# Altium PCB fpga.PcbDoc
Units mil, origin at the board's own origin, x right, y up, seen from the top; angles counter-clockwise.
Board outline 2800 x 2800 mil, 2 copper layers (Top Layer, Bottom Layer); 16 components, 104 nets, 284 pads, 58 vias.
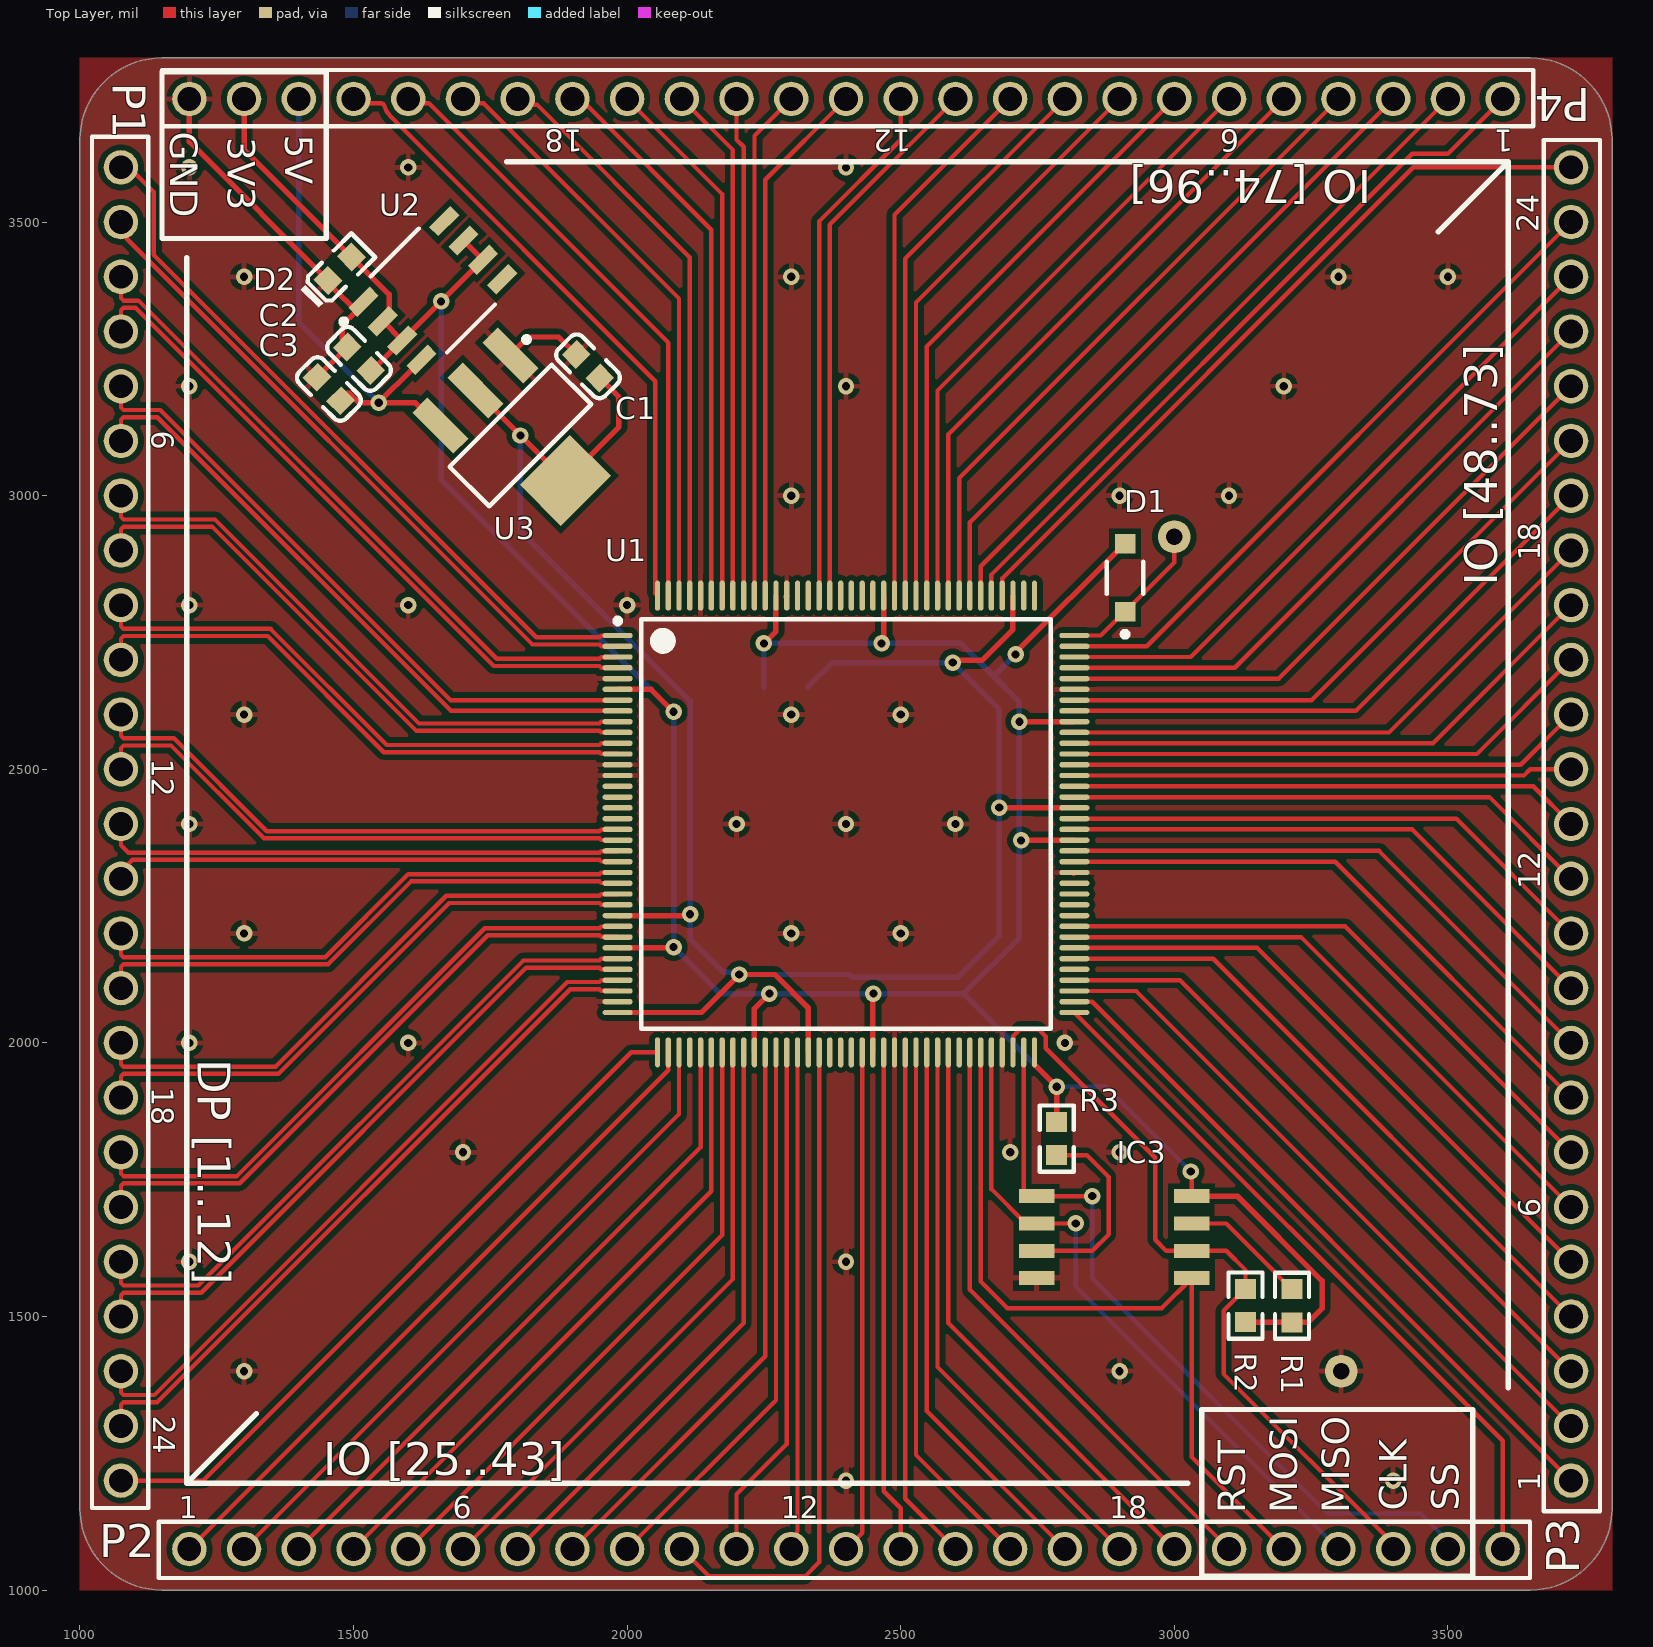
[diagram p0: Top Layer view]
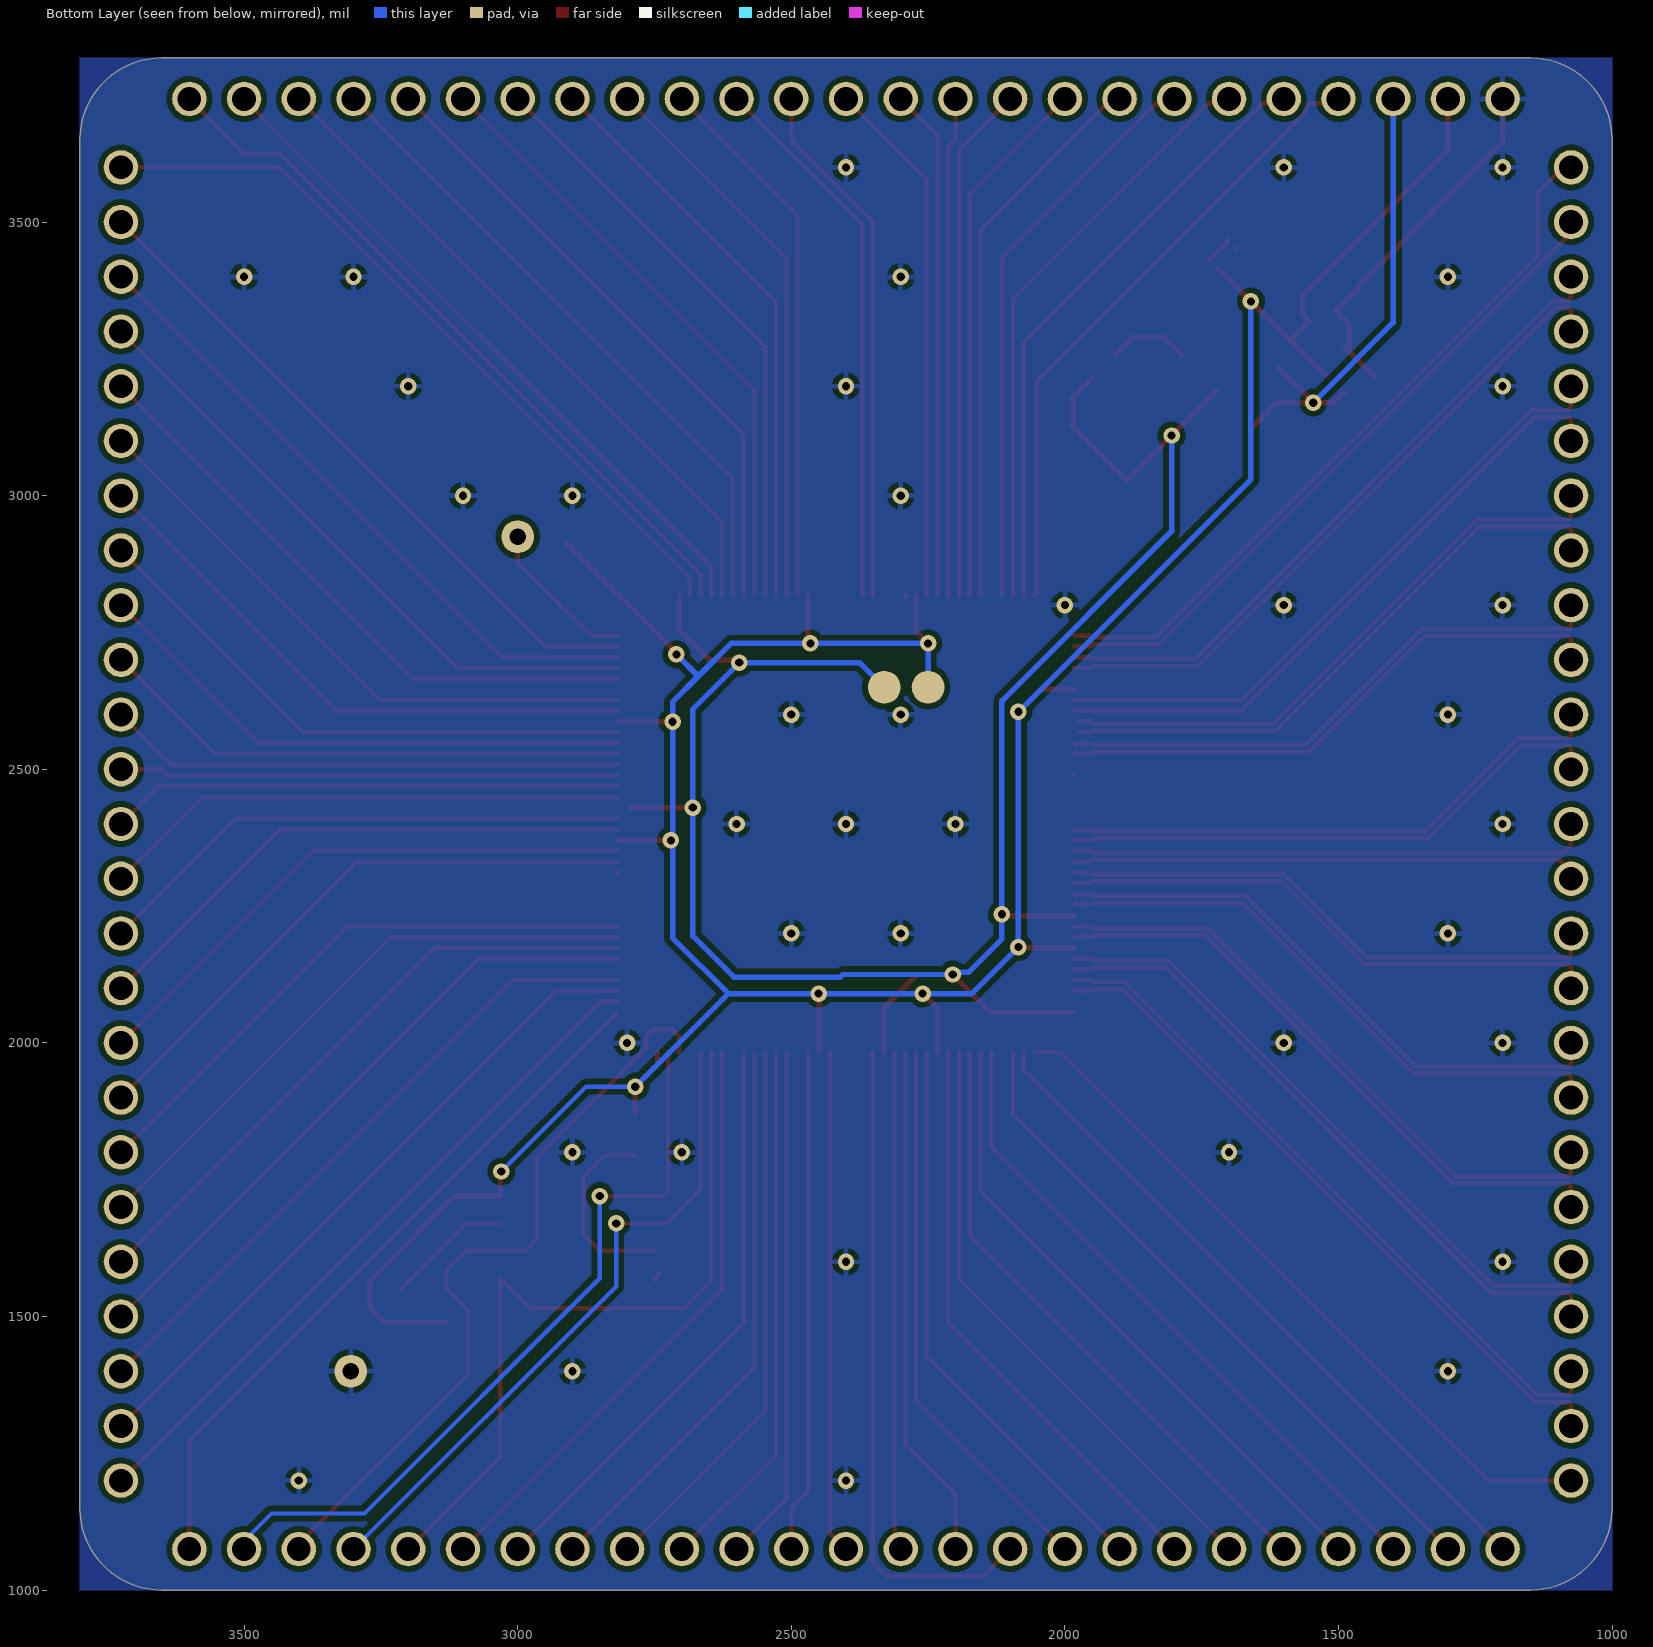
[diagram p1: Bottom Layer view, seen from below]
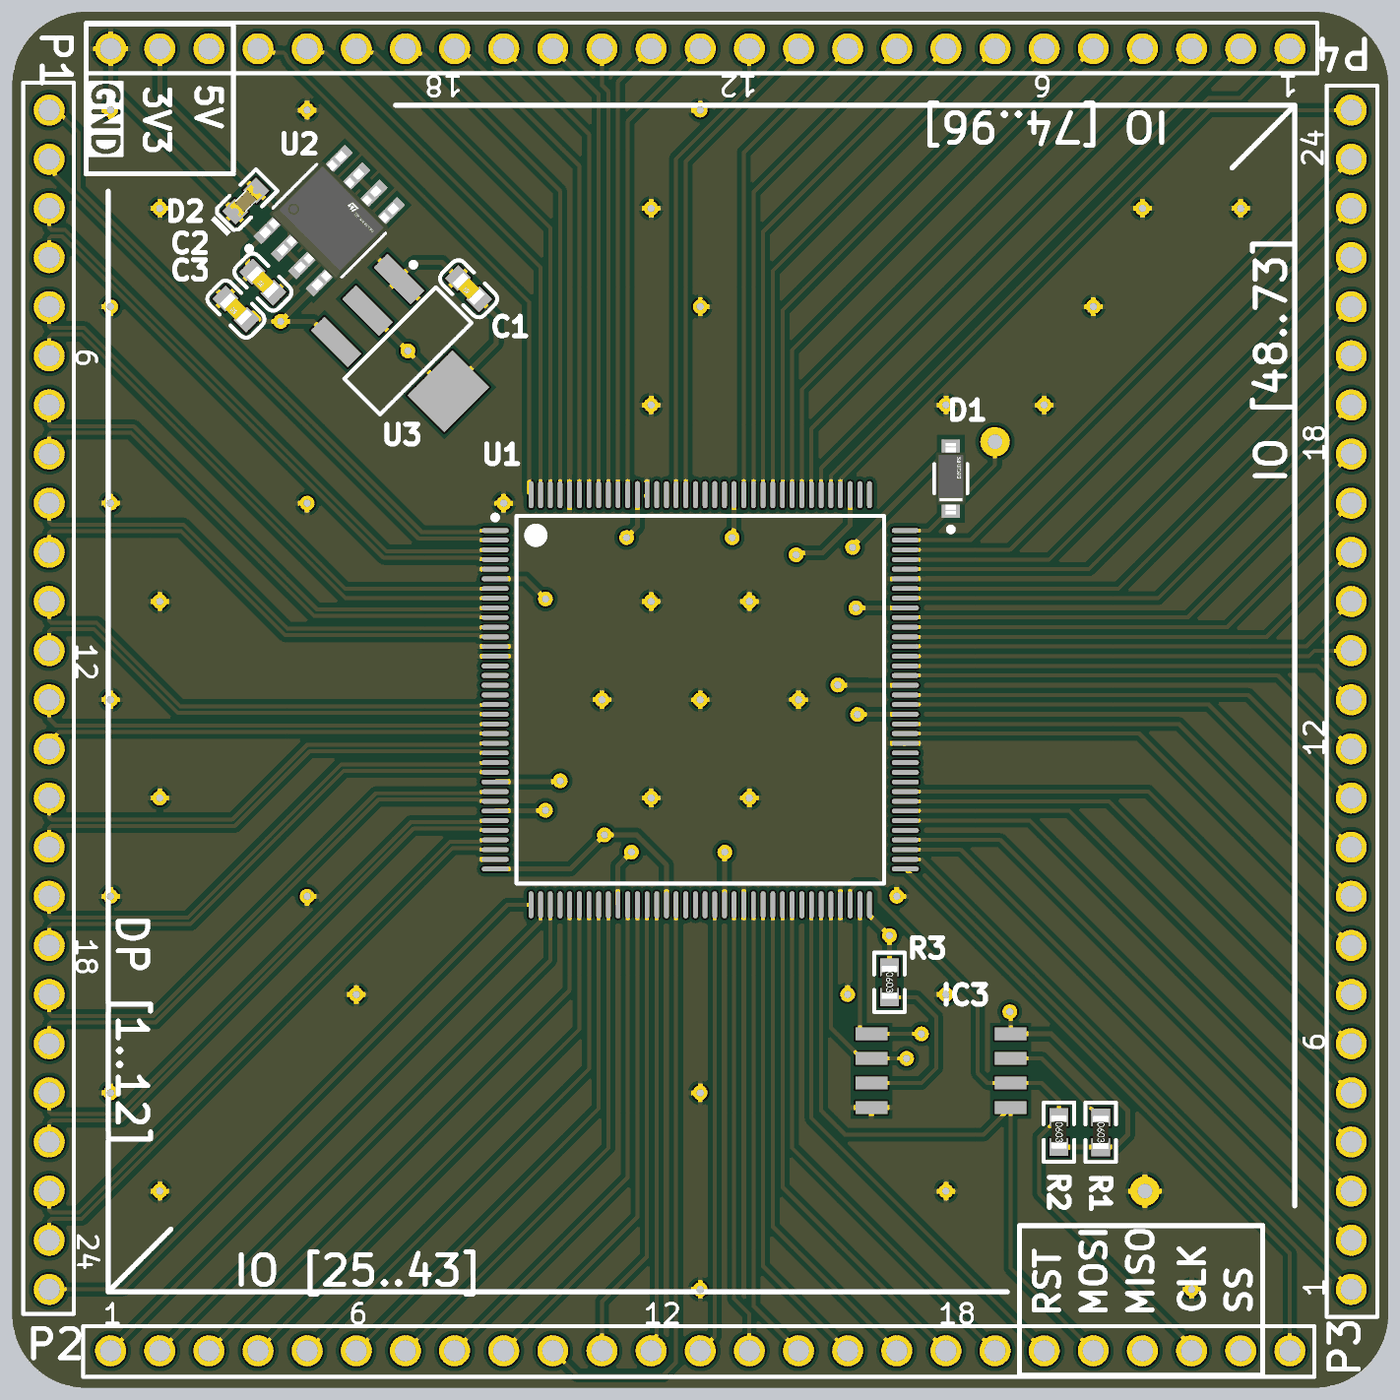
[diagram p2: 3D render of the assembled board from above, using the file's embedded part models]

## Layer stack, top to bottom
Top Solder: solder mask 0.4, Solder Resist, Dk 3.5
Top Layer: signal copper 1.4
Dielectric 1: dielectric 12.6, FR-4, Dk 4.8
Bottom Layer: signal copper 1.4
Bottom Solder: solder mask 0.4, Solder Resist, Dk 3.5

## Board outline
1000,1150 1000,3650 cw(c1150,3650) 1150,3800 3650,3800 cw(c3650,3650) 3800,3650 3800,1150 cw(c3650,1150) 3650,1000 1150,1000 cw(c1150,1150)

## Design rules (kind name [scope] priority, off if disabled: settings)
Clearance Clearance_5 [InPolygon] p1: gap=10 ignorepadtopadclearanceinfootprint=FALSE
Clearance [All] p2: gap=5 ignorepadtopadclearanceinfootprint=FALSE
DiffPairsRouting [All] p1: maxlimit=10 minlimit=5 mostfreqgap=5 toplayer_minwidth=5 toplayer_maxwidth=8 toplayer_prefwidth=8 bottomlayer_minwidth=5 bottomlayer_maxwidth=8 bottomlayer_prefwidth=8 maxuncoupledlength=500
MinimumSolderMaskSliver [All] p1: minsoldermaskwidth=7.87
MinimumSolderMaskSliver MinimumSolderMaskSliver_1 [All] p2: minsoldermaskwidth=0
PolygonConnect [All] p1: connectstyle=Relief reliefconductorwidth=10 reliefentries=4 polygonreliefangle="90 Angle" airgapwidth=10
RoutingVias [All] p1: holewidth=15 width=30 viastyle="Through Hole" minholewidth=15 minwidth=30 maxholewidth=15 maxwidth=30
SilkToSilkClearance [All] p1: silktosilkclearance=0
SilkToSolderMaskClearance [IsPad] p1: minsilkscreentomaskgap=6 clearancetoexposedcopper=TRUE
SilkToSolderMaskClearance SilkToSolderMaskClearance_1 [IsPad] p2: minsilkscreentomaskgap=7 clearancetoexposedcopper=TRUE
SolderMaskExpansion [All] p1: expansion=4 istentingtop=FALSE
SolderMaskExpansion SolderMaskExpansion_1 [All] p2: expansion=2 istentingtop=FALSE
Width [All] p1: maxlimit=16 minlimit=8 preferedwidth=8
26 further rules are at their usual default settings.

## Classes and differential pairs
component class fpga: C1 C2 D1 IC3 P1 P2 P3 R2 R3 U1 U2
differential pair P11: +P11_P -P11_N
differential pair P10: +P10_P -P10_N
differential pair P9: +P9_P -P9_N
differential pair P8: +P8_P -P8_N
differential pair P7: +P7_P -P7_N
differential pair P6: +P6_P -P6_N
differential pair P5: +P5_P -P5_N
differential pair P4: +P4_P -P4_N
differential pair P3: +P3_P -P3_N
differential pair P2: +P2_P -P2_N
differential pair P1: +P1_P -P1_N
differential pair P0: +P0_P -P0_N

## Components (designator, comment, footprint, x,y, rotation, side; value= is the part's Value field where it differs from the comment)
C1 "1uF (105) 10% 50V" 0603_C 1928.56,3236.44 r135 top
C2 "1uF (105) 10% 50V" 0603_C 1510,3250 r135 top
C3 "10uF (106) 10% 10V" 0603_C 1455,3195 r135 top
D1 "1N4148W-13-F" FP-SOD123-MFG 2910,2850 r90 top value=2pF
D2 "绿灯 0603" 0603_LED_S1 1475,3415 r45 top
IC3 "W25Q16JVSSIQ" SOIC127P790X216-8N 2890,1645 r0 top
P1 "61301011121" 61301011121 1000,3675 r270 top
P2 "61301011121" 61301011121 1125,1000 r0 top
P3 "61301011121" 61301011121 3800,1125 r90 top
P4 "61301011121" 61301011121 3675,3800 r180 top
R1 "10KΩ (1002) ±1%" 0603_R 3215,1519.69 r270 top
R2 "10KΩ (1002) ±1%" 0603_R 3130,1520 r270 top
R3 "10KΩ (1002) ±1%" 0603_R 2785,1825 r270 top
U1 "ICE40HX1K-TQ144" LATC-TQFP-144_L 2400,2400 r0 top
U2 "LD1117D33TR" FP-SO-8-0016023-MFG 1645,3375 r45 top
U3 "LD1117S12TR" SOT-223_M 1805,3110 r315 top

## Footprints (in the part's own frame and the unit in brackets; to place one, negate y for a bottom-side part, rotate by r counter-clockwise, add the part's x,y. Pads: shape width x height; smd on the part's side, far side on the other; paste and mask are expansions set on the pad)
0603_C [mm]
  rect 0.93x0.98 smd: 1(-0.77,0) 2(0.77,0)
  silkscreen extent -1.54,-0.79 1.54,0.79, body extent -0.8,-0.4 0.8,0.4, height 0.3
0603_LED_S1 [mm]
  rect 0.93x0.98 smd: A(0.77,0) K(-0.77,0)
  silkscreen extent -1.98,-0.79 1.54,0.79, body extent -0.8,-0.4 0.8,0.4, height 0.6
0603_R [mm]
  rect 0.93x0.98 smd: 1(-0.77,0) 2(0.77,0)
  silkscreen extent -1.53,-0.79 1.54,0.79, body extent -0.85,-0.4 0.85,0.4, height 0.56
61301011121 [mm] "Pin Header, pitch 2.54 mm, THT, Vertical, single row, 10p"
  round 1.6 hole 1.1: 1(1.905,1.905) 2(4.445,1.905) 3(6.985,1.905) 4(9.525,1.905) 5(12.065,1.905) 6(14.605,1.905) 7(17.145,1.905) 8(19.685,1.905) 9(22.225,1.905) 10(24.765,1.905) 11(27.305,1.905) 12(29.845,1.905) 13(32.385,1.905) 14(34.925,1.905) 15(37.465,1.905) 16(40.005,1.905) 17(42.545,1.905) 18(45.085,1.905) 19(47.625,1.905) 20(50.165,1.905) 21(52.705,1.905) 22(55.245,1.905) 23(57.785,1.905) 24(60.325,1.905) 25(62.865,1.905)
  silkscreen extent 0.49,0.56 64.13,3.18
FP-SO-8-0016023-MFG [mm]
  rect 1.4x0.6 smd paste+0 mask+0: 1(-2.65,1.905) 2(-2.65,0.635) 3(-2.65,-0.635) 4(-2.65,-1.905) 5(2.65,-1.905) 6(2.65,-0.635) 7(2.65,0.635) 8(2.65,1.905)
  silkscreen extent -4.07,-2.5 1.58,2.5, body extent -3.45,-2.6 3.45,2.6, height 0.25
FP-SOD123-MFG [mm]
  rect 0.9x0.95 smd paste+0 mask+0: 1(-1.575,0) 2(1.575,0)
  silkscreen extent -2.75,-0.85 0.75,0.85, body extent -2.12,-0.95 2.12,0.95, height 0.25
LATC-TQFP-144_L [mm] "QFP, 144-Leads, Body 20x20mm, Pitch 0.5mm, IPC High Density"
  oval 1.4x0.25 smd: 1(-10.6,8.75) 2(-10.6,8.25) 3(-10.6,7.75) 4(-10.6,7.25) 5(-10.6,6.75) 6(-10.6,6.25) 7(-10.6,5.75) 8(-10.6,5.25) 9(-10.6,4.75) 10(-10.6,4.25) 11(-10.6,3.75) 12(-10.6,3.25) 13(-10.6,2.75) 14(-10.6,2.25) 15(-10.6,1.75) 16(-10.6,1.25) 17(-10.6,0.75) 18(-10.6,0.25) 19(-10.6,-0.25) 20(-10.6,-0.75) 21(-10.6,-1.25) 22(-10.6,-1.75) 23(-10.6,-2.25) 24(-10.6,-2.75) 25(-10.6,-3.25) 26(-10.6,-3.75) 27(-10.6,-4.25) 28(-10.6,-4.75) 29(-10.6,-5.25) 30(-10.6,-5.75) 31(-10.6,-6.25) 32(-10.6,-6.75) 33(-10.6,-7.25) 34(-10.6,-7.75) 35(-10.6,-8.25) 36(-10.6,-8.75) 73(10.6,-8.75) 74(10.6,-8.25) 75(10.6,-7.75) 76(10.6,-7.25) 77(10.6,-6.75) 78(10.6,-6.25) 79(10.6,-5.75) 80(10.6,-5.25) 81(10.6,-4.75) 82(10.6,-4.25) 83(10.6,-3.75) 84(10.6,-3.25) 85(10.6,-2.75) 86(10.6,-2.25) 87(10.6,-1.75) 88(10.6,-1.25) 89(10.6,-0.75) 90(10.6,-0.25) 91(10.6,0.25) 92(10.6,0.75) 93(10.6,1.25) 94(10.6,1.75) 95(10.6,2.25) 96(10.6,2.75) 97(10.6,3.25) 98(10.6,3.75) 99(10.6,4.25) 100(10.6,4.75) 101(10.6,5.25) 102(10.6,5.75) 103(10.6,6.25) 104(10.6,6.75) 105(10.6,7.25) 106(10.6,7.75) 107(10.6,8.25) 108(10.6,8.75)
  oval 0.25x1.4 smd: 37(-8.75,-10.6) 38(-8.25,-10.6) 39(-7.75,-10.6) 40(-7.25,-10.6) 41(-6.75,-10.6) 42(-6.25,-10.6) 43(-5.75,-10.6) 44(-5.25,-10.6) 45(-4.75,-10.6) 46(-4.25,-10.6) 47(-3.75,-10.6) 48(-3.25,-10.6) 49(-2.75,-10.6) 50(-2.25,-10.6) 51(-1.75,-10.6) 52(-1.25,-10.6) 53(-0.75,-10.6) 54(-0.25,-10.6) 55(0.25,-10.6) 56(0.75,-10.6) 57(1.25,-10.6) 58(1.75,-10.6) 59(2.25,-10.6) 60(2.75,-10.6) 61(3.25,-10.6) 62(3.75,-10.6) 63(4.25,-10.6) 64(4.75,-10.6) 65(5.25,-10.6) 66(5.75,-10.6) 67(6.25,-10.6) 68(6.75,-10.6) 69(7.25,-10.6) 70(7.75,-10.6) 71(8.25,-10.6) 72(8.75,-10.6) 109(8.75,10.6) 110(8.25,10.6) 111(7.75,10.6) 112(7.25,10.6) 113(6.75,10.6) 114(6.25,10.6) 115(5.75,10.6) 116(5.25,10.6) 117(4.75,10.6) 118(4.25,10.6) 119(3.75,10.6) 120(3.25,10.6) 121(2.75,10.6) 122(2.25,10.6) 123(1.75,10.6) 124(1.25,10.6) 125(0.75,10.6) 126(0.25,10.6) 127(-0.25,10.6) 128(-0.75,10.6) 129(-1.25,10.6) 130(-1.75,10.6) 131(-2.25,10.6) 132(-2.75,10.6) 133(-3.25,10.6) 134(-3.75,10.6) 135(-4.25,10.6) 136(-4.75,10.6) 137(-5.25,10.6) 138(-5.75,10.6) 139(-6.25,10.6) 140(-6.75,10.6) 141(-7.25,10.6) 142(-7.75,10.6) 143(-8.25,10.6) 144(-8.75,10.6)
  silkscreen extent -10.72,-9.5 9.5,9.55, body extent -10,-10 10,10, height 1.6
SOIC127P790X216-8N [mm]
  rect 1.65x0.65 smd: 1(-3.6,1.905) 2(-3.6,0.635) 3(-3.6,-0.635) 4(-3.6,-1.905) 5(3.6,-1.905) 6(3.6,-0.635) 7(3.6,0.635) 8(3.6,1.905)
SOT-223_M [mm] "SOT223, 4-Leads, Body 6.5x3.5mm, Pitch 2.3mm, Lead Span 7mm, IPC Low Density"
  rect 2.7x1 smd: 1(-2.95,2.3) 2(-2.95,0) 3(-2.95,-2.3)
  rect 2.7x3.3 smd: 4(2.95,0)
  silkscreen extent -3.07,-3.35 1.3,3.47, body extent -1.85,-3.35 1.85,3.35, height 1.8

## Part data
C1 C2: library part "0603 1uF (105) 10% 50V", "贴片电容", Package=0603, SuppliersPartNumber=C15849, ComponentLink1Description=供应商链接, ComponentLink1URL=http://www.szlcsc.com/product/details_16531.html, Supplier=LC
C3: library part "0603 10uF (106) 10% 10V", "贴片电容", Package=0603, SuppliersPartNumber=C19702, ComponentLink1Description=供应商链接, ComponentLink1URL=http://www.szlcsc.com/product/details_20411.html, Supplier=LC
D1: library part CMP-12791-000005-1, "DIODE GEN PURP 100V 150MA SOD123", Capacitance=2pF, Forward Current=300mA, Manufacturer="Diodes Inc.", Max Junction Temp=+150°C, Max Repetitive Reverse Voltage=100V, Max Surge Forward Current=1A, Package=SOD123, Peak Reverse Current=1uA, Temperature="-65°C to +150°C", Temperature Range Low=-65°C, Automotive=No, Category=Diode, ComponentLink2Description=Datasheet, ComponentLink2URL=https://upverter.com/datasheet/628e7d6fee5901eee6eef4567d1c3569f2cd3cde.pdf, Device Class L1="Discrete Semiconductors", Device Class L2=Diodes, Device Class L3="Rectifier Diodes", Digikey Description="DIODE GEN PURP 100V 150MA SOD123", Footprint Url=https://www.diodes.com/assets/Package-Files/SOD123.pdf, Height=1.45mm, Lead Free=Yes, Manufacturer Part Number=1N4148W-13-F, Mouser Description="1N4148W Series 2 A 100 V 400 mW Surface Mount Fast Switching Diode - SOD-123", Octopart=https://octopart.com/1n4148w-13-f-diodes+inc.-2359612, Reverse Voltage=100V, RoHS=TRUE, Standoff Height=0mm, Temperature Range High=+150°C
D2: library part "0603 绿灯", "发光二极管", Package=0603, SuppliersPartNumber=C72043, ComponentLink1Description=供应商链接, ComponentLink1URL=http://www.szlcsc.com/product/details_73152.html, Supplier=LC
IC3: Manufacturer_Name=Winbond, Package=SOIC127P790X216-8N, Arrow_Part_Number=W25Q16JVSSIQ, Arrow_Price-Stock=https://www.arrow.com/en/products/w25q16jvssiq/winbond-electronics, DeviceSetName=W25Q16JVSSIQ, GateName_1=G$1, Height=2.16mm, LibraryName=W25Q16JVSSIQ, Manufacturer_Part_Number=W25Q16JVSSIQ, Mouser_Part_Number=454-W25Q16JVSSIQ, Mouser_Price-Stock=https://www.mouser.co.uk/ProductDetail/Winbond/W25Q16JVSSIQ?qs=qSfuJ%252Bfl%2Fd46L%2F1QrQC%2Fog%3D%3D, SymbolName_1=W25Q16JVSSIQ
P1 P2 P3 P4: library part header, "THT Vertical Pin Header WR-PHD, Pitch 2.54 mm, Single Row, 25 pins"
R1 R2 R3: library part "0603 10KΩ (1002) 1%", "贴片电阻", Package=0603, SuppliersPartNumber=C25804, ComponentLink1Description=供应商链接, ComponentLink1URL=http://www.szlcsc.com/product/details_26547.html, Supplier=LC
U1: library part CMP-0962-00009-1, "iCE40 HX1K Series FPGA Family, 1280 Logic Cells, 1.2 V Core, 64 K Embedded RAM Bits, 144-pin TQFP, Pb-Free, Tray", Manufacturer="Lattice Semiconductor", Supply Voltage=1.2V, ComponentLink1Description="Manufacturer URL", ComponentLink1URL=http://www.latticesemi.com/en, ComponentLink2Description=Datasheet, ComponentLink2URL=http://www.latticesemi.com/~/media/Documents/DataSheets/iCE/iCE40LPHXFamilyDataSheet.pdf, ComponentLink3Description="Package Specification", ComponentLink3URL=http://www.latticesemi.com/lit/docs/package/pkg.pdf, DatasheetVersion="Rev. 02.9", Embedded RAM Bits=64K, Logic Cells=1280, Mounting Technology="Surface Mount", PackageDescription="144-Pin Thin Quad Flat Package, Body 20 x 20 mm, Pitch 0.5 mm", PackageReference=TQFP-144, PackageVersion="Rev. 03.9, 02/2013", Packing=Tray, PartNumber=ICE40HX1K-TQ144, Phase-Locked Loops=1, RoHS=TRUE
U2: library part CMP-0244-00261-2, "IC REG LINEAR 3.3V 800MA 8SO", Case/Package=SO, Dropout Voltage=1.1V, Input Bias Current=5mA, Max Input Voltage=15V, Max Operating Temperature=150°C, Max Output Current=1.3A, Max Power Dissipation=12W, Min Operating Temperature=0°C, Min Output Voltage=3.3V, Output Current=800mA, Output Voltage Accuracy=1%, Package Quantity=1, Quiescent Current=10mA, Accuracy=1%, Height=1.65mm, Lead Free="Lead Free", Length=5mm, Mount="Surface Mount", Number of Outputs=1, Number of Pins=8, Number of Regulators=1, Output Type=Fixed, Output Voltage=3.3V, Packaging="Tape and Reel", Polarity=Positive, Power Dissipation=12W, Radiation Hardening=No, Width=4mm
U3: library part CMP-0244-00318-1, "Fixed Low Drop Positive Voltage Regulator, 1.2V, 4-Pin SOT-223, Tape and Reel", ComponentLink1Description="Manufacturer URL", ComponentLink1URL=http://www.st.com, ComponentLink2Description=Datasheet, ComponentLink2URL=http://www.st.com/internet/com/TECHNICAL_RESOURCES/TECHNICAL_LITERATURE/DATASHEET/CD00000544.pdf, DatasheetVersion=1/11/2011, PackageDescription="4-Pin SOT-223 Package, 6.5 x 3.5 mm Body, 2.3 mm Pitch, 7 mm Lead Span", PackageReference=SOT-223, PackageVersion=2010

## Free pads (board coordinates)
  round 60 smd far side: 8(2330,2650) 9(2250,2650)
  round 60 hole 30: 11(3000,2925) 13(3305,1400)

## Via types
v1: diameter 30, hole 15, Top Layer to Bottom Layer, 58 vias

## Nets (pads, with @x,y where several pads share a name; then routed paths per layer and width w, separated by ;. In a path a pad name is that pad's centre, name@x,y a point inside that pad or via, vN(x,y) a via of type N, cw(c..) or ccw(c..) an arc to the next point about the centre after c; other vN are vias at no path point)
1V2: C1.1 pad.8 U1.27 U1.36 U1.51 U1.92 U1.111 U3.2 U3.4 | length 3895.7
  Top Layer w10: U3.2 U3.4 1985,3125.75 1985,3180 C1.1 ; U1.36 2135.54,2055.51 v1@2204.97,2124.95 ; U1.27 1982.76,2232.76 2112.76,2232.76 v1(2115,2235) ; v1(2205,2124.97) 2270.03,2124.97 2331.02,2063.98 2331.02,1982.76 U1.51 ; v1(2595,2695) 2598.83,2698.83 2648.83,2698.83 2705.06,2755.06 U1.111 ; v1(2680,2430) 2741.8,2430 2742.28,2429.53 U1.92@2794.76,2429.53
  Bottom Layer w10: v1(1805,3110) 1805,2935 2115,2625 v1(2115,2235) 2115,2190 2176.2,2128.8 2201.17,2128.8 v1(2205,2124.97) 2405.22,2124.97 2410.19,2120 2605,2120 2680,2195 v1(2680,2430) ; pad.8 2375,2695 v1(2595,2695) 2680,2610 v1@2680,2430.08
3V3: C2.1 D1.2 D2.A IC3.8 P4.24 pad.9 R1.2 R2.2 R3.1 U1.6 U1.30 U1.46 U1.57 U1.72 U1.89 U1.100 U1.123 U1.133 U2.2 U2.3 U2.6 U2.7 | length 6389.2
  Top Layer w8: v1(3030,1765) 3031.73,1763.27 IC3.8
  Top Layer w10: P4.24 1300,3632.87 1506.44,3426.44 1565,3367.87 1565,3339.99 1564.69,3339.67 1564.69,3330.04 U2.2 U2.3@1588.82,3283.64 ; C2.1@1522.87,3222.13 1527.48,3222.13 1573.9,3268.55 1573.9,3268.73 U2.3@1588.82,3283.64 ; U2.3 U2.3@1588.82,3283.64 ; U2.7 U2.6 ; U2.6@1721.45,3416.1 1721.27,3416.1 1660.18,3355 v1(1660,3355) 1660,3354.82 U2.3@1588.82,3283.64 ; U1.30 1982.76,2173.7 2083.7,2173.7 v1(2085,2175) ; U1.6 2043.94,2646.06 v1(2085,2605) ; U1.46 2232.68,2062.68 v1(2260,2090) ; v1(2250,2730) 2272.05,2752.05 U1.133 ; U1.57 2449.29,1982.76 2449.29,2089.29 v1(2450,2090) ; v1(2465,2730) 2468.82,2733.82 2468.82,2817.24 U1.123 ; v1(2710,2710) 2710,2712.99 2909.02,2912.01 D1.2 ; v1(2716.93,2586.93) 2817.24,2586.93 U1.100 ; v1(2720,2370) 2720.47,2370.47 U1.89 ; U1.72 2744.49,1960.2 2744.57,1960.12 2744.88,1960.12 v1(2785,1920) R3.1@2785,1870.31 ; IC3.8 3115,1720 3270,1565 3270,1515 3244.37,1489.37 R1.2 3214.69,1489.68 R2.2
  Bottom Layer w8: v1(2785,1920) 2875,1920 v1(3030,1765)
  Bottom Layer w10: v1(1660,3355) 1660,3030 v1(2085,2605) v1(2085,2175) 2170,2090 v1(2260,2090) v1(2450,2090) 2615,2090 ; pad.9 v1(2250,2730) v1(2465,2730) 2610,2730 2670,2670 ; v1(2710,2710) 2670,2670 ; v1(2785,1920) 2615,2090 ; 2615,2090 2716.93,2191.93 v1(2716.93,2586.93) 2716.93,2623.07 2670,2670
5V: C3.1 P4.23 U2.4 U3.3 | length 900.3
  Top Layer w10: C3.1@1487.87,3187.13 1492.43,3187.13 1509.56,3170 v1(1546.07,3170) ; U2.4@1609.26,3233.19 v1(1546.07,3170) ; U3.3 1654.56,3128.1 1612.66,3170 v1(1546.07,3170)
  Bottom Layer w10: P4.23 1400,3316.07 v1(1546.07,3170)
CRESET_B: P2.20 U1.66 | length 1103.9
  Top Layer w8: U1.66 2626.38,1548.62 P2.20
GND: C1.2 C2.2 C3.2 D2.K IC3.4 P4.25 pad.13 U1.5 U1.13 U1.14 U1.35 U1.59 U1.69 U1.86 U1.103 U1.132 U1.140 U2.1 U3.1 | length 839.1
  Top Layer w8: U1.14 U1.14@1983.03,2488.94 ; U1.132@2291.38,2816.97 U1.132 ; U1.86@2816.97,2311.06 U1.86
  Top Layer w10: P4.25 1200,3647.13 1463.56,3383.56 1463.56,3378.89 1503.19,3339.26 1503.19,3335.68 1479.03,3311.52 1479.03,3286.18 1480.7,3284.52 1480,3283.82 C2.2@1480,3265 ; C3.2 C2.2 ; U3.1 1786.9,3258.17 1818.74,3290 1875,3290 C1.2 ; U1.132@2290,2815.59 U1.132@2291.38,2816.97 ; IC3.4@2740.47,1577.8 IC3.4 ; U1.86@2815.91,2310 U1.86@2816.97,2311.06
  other v1: 2400,1200 3400,1200 1300,1400 2900,1400 1200,1600 2400,1600 1700,1800 2700,1800 2900,1800 1200,2000 1600,2000 2800,2000 1300,2200 2300,2200 2500,2200 1200,2400 2200,2400 2400,2400 2600,2400 1300,2600 2300,2600 2500,2600 1200,2800 1600,2800 2000,2800 2300,3000 2900,3000 3100,3000 1200,3200 2400,3200 3200,3200 1300,3400 2300,3400 3300,3400 3500,3400 1200,3600 1600,3600 2400,3600
ICE_CLK: IC3.6 P2.23 R2.1 U1.70 | length 1398.1
  Top Layer w8: U1.70 2705.47,1983.03 2705.47,2012.74 2717.73,2025 2751.56,2025 2765,2011.56 2765,1990 2965,1790 2965,1640 2985,1620 IC3.6 3095,1620 3130,1585 R2.1 3129.02,1550.31 3114.71,1536.01 3114.71,1535.02 3090,1510.31 3090,1395 3400,1085 P2.23
ICE_MISO: IC3.2 P2.22 U1.68 | length 1223.9
  Top Layer w8: U1.68 2665.75,1732.84 2728.59,1670 IC3.2 v1(2820,1670)
  Bottom Layer w8: v1(2820,1670) 2820,1555 P2.22
ICE_MOSI: IC3.5 P2.21 U1.67 | length 1412.2
  Top Layer w8: U1.67 2646.06,1563.94 2695,1515 2976.73,1515 IC3.5 3031.73,1243.27 P2.21
ICE_SS: IC3.1 P2.24 U1.71 | length 1396.5
  Top Layer w8: U1.71 2724.8,1728.8 2733.6,1720 v1(2850,1720)
  Bottom Layer w8: v1(2850,1720) 2850,1570 3280,1140 3450,1140 3484.74,1105.26 3484.74,1105.14 3500,1089.88 P2.24
NetD1_1: D1.1 pad.11 U1.108 | length 285.6
  Top Layer w8: U1.108 2865.51,2744.49 2909.02,2787.99 D1.1 2910.98,2787.99 2924.7,2801.71 2924.7,2802.69 3000,2877.99 pad.11
NetIC3_3: IC3.3 R3.2 | length 360.6
  Top Layer w8: IC3.3 2850,1620 2880,1650 2880,1755 2840.32,1794.68 R3.2
NetIC3_7: IC3.7 R1.1 | length 233.6
  Top Layer w8: IC3.7 3095,1670 3184.02,1580.98 3184.02,1580 3214.02,1550 R1.1
P0_N: P1.2 U1.2 | length 1240.5
  Top Layer w8: P1.2 1085.52,3489.48 1085.52,3469.48 1826.85,2728.15 1949.62,2728.15 1952.61,2725.16 1982.32,2725.16 U1.2
P0_P: P1.1 U1.1 | length 1332.2
  Top Layer w8: P1.1 1089.88,3600 1105.14,3584.74 1105.26,3584.74 1135,3555 1135,3440 1833.85,2741.15 1949.62,2741.15 1952.61,2744.14 1982.32,2744.14 U1.1
P1_N: P1.4 U1.4 | length 1221
  Top Layer w8: P1.4 1075,3338.81 1079.69,3343.5 1101.5,3343.5 1756.22,2688.78 1949.62,2688.78 1952.61,2685.79 1982.32,2685.79 U1.4
P1_P: P1.3 U1.3 | length 1221
  Top Layer w8: P1.3 1075,3361.19 1079.69,3356.5 1106.88,3356.5 1761.61,2701.78 1949.62,2701.78 1952.61,2704.77 1982.32,2704.77 U1.3
P2_N: P1.6 U1.8 | length 1170.8
  Top Layer w8: P1.6 1075,3138.81 1079.69,3143.5 1141.5,3143.5 1677.95,2607.05 1982.32,2607.05 U1.8
P2_P: P1.5 U1.7 | length 1168.2
  Top Layer w8: P1.5 1075,3161.19 1079.69,3156.5 1146.88,3156.5 1677.23,2626.16 1982.46,2626.16 U1.7
P3_N: P1.8 U1.10 | length 1095.3
  Top Layer w8: P1.8 1075,2938.81 1079.69,2943.5 1241.5,2943.5 1614.33,2570.67 1949.62,2570.67 1952.61,2567.68 U1.10@1973.88,2567.68
P3_P: P1.7 U1.9 | length 1096
  Top Layer w8: P1.7 1075,2961.19 1079.69,2956.5 1246.88,2956.5 1619.72,2583.67 1949.62,2583.67 1952.61,2586.66 U1.9@1974.59,2586.66
P4_N: P1.10 U1.12 | length 1037.7
  Top Layer w8: P1.10 1075,2738.81 1079.69,2743.5 1343.12,2743.5 1555.32,2531.3 1949.62,2531.3 1952.61,2528.31 1982.32,2528.31 U1.12
P4_P: P1.9 U1.11 | length 1037.7
  Top Layer w8: P1.9 1075,2761.19 1079.69,2756.5 1348.5,2756.5 1560.7,2544.3 1949.62,2544.3 1952.61,2547.29 1982.32,2547.29 U1.11
P5_N: P1.12 U1.20 | length 1020.1
  Top Layer w8: P1.12 1075,2538.81 1079.69,2543.5 1166.5,2543.5 1336.19,2373.81 1949.62,2373.81 1952.61,2370.82 1982.32,2370.82 U1.20
P5_P: P1.11 U1.19 | length 1020.1
  Top Layer w8: P1.11 1075,2561.19 1079.69,2556.5 1171.88,2556.5 1341.57,2386.81 1949.62,2386.81 1952.61,2389.8 1982.32,2389.8 U1.19
P6_N: P1.14 U1.22 | length 931.5
  Top Layer w8: P1.14 1075,2314 1095.44,2334.44 1949.62,2334.44 1952.61,2331.45 1982.32,2331.45 U1.22
P6_P: P1.13 U1.21 | length 953.6
  Top Layer w8: P1.13 1075,2361.19 1088.74,2347.44 1949.62,2347.44 1952.61,2350.43 1982.32,2350.43 U1.21
P7_N: P1.16 U1.24 | length 1012.6
  Top Layer w8: P1.16 1075,2138.81 1079.69,2143.5 1453.5,2143.5 1605.07,2295.07 1949.62,2295.07 1952.61,2292.08 1982.32,2292.08 U1.24
P7_P: P1.15 U1.23 | length 1012.6
  Top Layer w8: P1.15 1075,2161.19 1079.69,2156.5 1448.12,2156.5 1599.69,2308.07 1949.62,2308.07 1952.61,2311.06 1982.32,2311.06 U1.23
P8_N: P1.18 U1.26 | length 1079.1
  Top Layer w8: P1.18 1075,1938.81 1079.69,1943.5 1362.71,1943.5 1674.91,2255.7 1949.62,2255.7 1952.61,2252.71 1982.32,2252.71 U1.26
P8_P: P1.17 U1.25 | length 1079.1
  Top Layer w8: P1.17 1075,1961.19 1079.69,1956.5 1357.32,1956.5 1669.53,2268.7 1949.62,2268.7 1952.61,2271.69 1982.32,2271.69 U1.25
P9_N: P1.20 U1.29 | length 1137.5
  Top Layer w8: P1.20 1075,1738.81 1079.69,1743.5 1292.24,1743.5 1745.39,2196.65 1949.62,2196.65 1952.61,2193.66 1982.32,2193.66 U1.29
P9_P: P1.19 U1.28 | length 1137.5
  Top Layer w8: P1.19 1075,1761.19 1079.69,1756.5 1286.85,1756.5 1740,2209.65 1949.62,2209.65 1952.61,2212.64 1982.32,2212.64 U1.28
P10_N: P1.22 U1.32 | length 1195.9
  Top Layer w8: P1.22 1075,1538.81 1079.69,1543.5 1221.76,1543.5 1815.86,2137.59 1949.62,2137.59 1952.61,2134.6 1982.32,2134.6 U1.32
P10_P: P1.21 U1.31 | length 1195.9
  Top Layer w8: P1.21 1075,1561.19 1079.69,1556.5 1216.38,1556.5 1810.47,2150.59 1949.62,2150.59 1952.61,2153.58 1982.32,2153.58 U1.31
P11_N: P1.24 U1.34 | length 1262.4
  Top Layer w8: P1.24 1075,1338.81 1079.69,1343.5 1141.45,1343.5 1896.17,2098.22 1949.62,2098.22 1952.61,2095.23 1982.32,2095.23 U1.34
P11_P: P1.23 U1.33 | length 1262.4
  Top Layer w8: P1.23 1075,1361.19 1079.69,1356.5 1136.06,1356.5 1890.79,2111.22 1949.62,2111.22 1952.61,2114.21 1982.32,2114.21 U1.33
P24: P1.25 U1.37 | length 1304.7
  Top Layer w8: P1.25 1225,1200 2007.68,1982.68 U1.37
P25: P2.1 U1.38 | length 1270.2
  Top Layer w8: P2.1 2075.2,1950.2 U1.38
P26: P2.2 U1.39 | length 1236.9
  Top Layer w8: P2.2 2094.88,1869.88 U1.39
P27: P2.3 U1.41 | length 1211.8
  Top Layer w8: P2.3 2134.25,1809.25 U1.41
P28: P2.4 U1.42 | length 1178.5
  Top Layer w8: P2.4 2153.94,1728.94 U1.42
P29: P2.5 U1.43 | length 1145.3
  Top Layer w8: P2.5 2173.62,1648.62 U1.43
P30: P2.6 U1.44 | length 1112
  Top Layer w8: P2.6 2193.31,1568.31 U1.44
P31: P2.7 U1.45 | length 1078.7
  Top Layer w8: P2.7 2212.99,1487.99 U1.45
P32: P2.8 U1.47 | length 1053.6
  Top Layer w8: P2.8 2252.36,1427.36 U1.47
P33: P2.9 U1.48 | length 1020.4
  Top Layer w8: P2.9 2272.05,1347.05 U1.48
P34: P2.10 U1.52 | length 1214.1
  Top Layer w8: P2.10 2150,1025 2325,1025 2350.79,1050.79 U1.52
P35: P2.11 U1.49 | length 945.7
  Top Layer w8: P2.11 2200,1175 2291.73,1266.73 U1.49
P36: P2.12 U1.50 | length 912.4
  Top Layer w8: P2.12 2310.52,1085.52 2310.52,1106.29 2311.42,1107.18 U1.50
P37: P2.13 U1.56 | length 919.9
  Top Layer w8: P2.13 2429.53,1104.53 U1.56
P38: P2.14 U1.58 | length 920.6
  Top Layer w8: U1.58 2468.9,1180.65 2500,1149.54 P2.14
P39: P2.15 U1.60 | length 945.7
  Top Layer w8: U1.60 2508.27,1166.73 P2.15
P40: P2.16 U1.61 | length 978.9
  Top Layer w8: U1.61 2527.95,1247.05 P2.16
P41: P2.17 U1.62 | length 1012.2
  Top Layer w8: U1.62 2547.64,1327.36 P2.17
P42: P2.18 U1.63 | length 1045.5
  Top Layer w8: U1.63 2567.32,1407.68 P2.18
P43: P2.19 U1.64 | length 1078.7
  Top Layer w8: U1.64 2587.01,1487.99 P2.19
P48: P2.25 U1.73 | length 1304.7
  Top Layer w8: U1.73 3600,1272.83 P2.25
P49: P3.1 U1.74 | length 1270.2
  Top Layer w8: U1.74 2849.8,2075.2 P3.1
P50: P3.2 U1.75 | length 1236.9
  Top Layer w8: U1.75 2930.12,2094.88 P3.2
P51: P3.3 U1.76 | length 1203.7
  Top Layer w8: U1.76 3010.43,2114.57 P3.3
P52: P3.4 U1.78 | length 1178.5
  Top Layer w8: U1.78 3071.06,2153.94 P3.4
P53: P3.5 U1.79 | length 1145.3
  Top Layer w8: U1.79 3151.38,2173.62 P3.5
P54: P3.6 U1.80 | length 1112
  Top Layer w8: U1.80 3231.69,2193.31 P3.6
P55: P3.7 U1.81 | length 1078.7
  Top Layer w8: U1.81 3312.01,2212.99 P3.7
P56: P3.8 U1.87 | length 1086.2
  Top Layer w8: U1.87 3293.9,2331.1 P3.8
P57: P3.9 U1.88 | length 1053
  Top Layer w8: U1.88 3374.21,2350.79 P3.9
P58: P3.10 U1.90 | length 1027.9
  Top Layer w8: U1.90 3434.84,2390.16 P3.10
P59: P3.11 U1.91 | length 994.6
  Top Layer w8: U1.91 3515.16,2409.84 P3.11
P60: P3.12 U1.93 | length 969.5
  Top Layer w8: U1.93 3575.79,2449.21 P3.12
P61: P3.13 U1.94 | length 936.2
  Top Layer w8: U1.94 3656.1,2468.9 P3.13
P62: P3.14 U1.95 | length 912.4
  Top Layer w8: U1.95 3639.04,2488.58 3650.46,2500 P3.14
P63: P3.15 U1.96 | length 945.7
  Top Layer w8: U1.96 3633.27,2508.27 P3.15
P64: P3.16 U1.97 | length 978.9
  Top Layer w8: U1.97 3552.95,2527.95 P3.16
P65: P3.17 U1.98 | length 1012.2
  Top Layer w8: U1.98 3472.64,2547.64 P3.17
P66: P3.18 U1.99 | length 1045.5
  Top Layer w8: U1.99 3392.32,2567.32 P3.18
P67: P3.19 U1.101 | length 1070.6
  Top Layer w8: U1.101 3331.69,2606.69 P3.19
P68: P3.20 U1.102 | length 1103.9
  Top Layer w8: U1.102 3251.38,2626.38 P3.20
P69: P3.21 U1.104 | length 1129
  Top Layer w8: U1.104 3190.75,2665.75 P3.21
P70: P3.22 U1.105 | length 1162.2
  Top Layer w8: U1.105 3110.43,2685.43 P3.22
P71: P3.23 U1.106 | length 1195.5
  Top Layer w8: U1.106 3030.12,2705.12 P3.23
P72: P3.24 U1.107 | length 1228.8
  Top Layer w8: U1.107 2949.8,2724.8 P3.24
P73: P3.25 U1.112 | length 1382.2
  Top Layer w8: U1.112 2685.43,2848.88 3436.55,3600 P3.25
P74: P4.1 U1.113 | length 1332.7
  Top Layer w8: U1.113 2665.75,2855.75 3435,3625 3500,3625 P4.1
P75: P4.2 U1.114 | length 1261.4
  Top Layer w8: U1.114 2646.06,2871.06 P4.2
P76: P4.3 U1.115 | length 1228.1
  Top Layer w8: U1.115 2626.38,2951.38 P4.3
P77: P4.4 U1.116 | length 1194.9
  Top Layer w8: U1.116 2606.69,3031.69 P4.4
P78: P4.5 U1.117 | length 1161.6
  Top Layer w8: U1.117 2587.01,3112.01 P4.5
P79: P4.6 U1.118 | length 1128.3
  Top Layer w8: U1.118 2567.32,3192.32 P4.6
P80: P4.7 U1.119 | length 1095.1
  Top Layer w8: U1.119 2547.64,3272.64 P4.7
P81: P4.8 U1.120 | length 1061.8
  Top Layer w8: U1.120 2527.95,3352.95 P4.8
P82: P4.9 U1.121 | length 1028.5
  Top Layer w8: U1.121 2508.27,3433.27 P4.9
P83: P4.10 U1.122 | length 995.2
  Top Layer w8: U1.122 2488.58,3513.58 P4.10
P84: P4.11 U1.128 | length 1002.8
  Top Layer w8: U1.128 2370.47,3495.47 P4.11
P85: P4.12 U1.129 | length 969.5
  Top Layer w8: U1.129 2350.79,3501.24 2500,3650.46 P4.12
P87: P4.13 U1.134 | length 968.8
  Top Layer w8: U1.134 2252.36,3577.36 P4.13
P88: P4.14 U1.135 | length 935.6
  Top Layer w8: U1.135 2232.68,3657.68 P4.14
P89: P4.15 U1.136 | length 913.1
  Top Layer w8: P4.15 2200,3650.46 2212.99,3637.46 U1.136
P90: P4.16 U1.137 | length 946.3
  Top Layer w8: P4.16 2193.31,3631.69 U1.137
P91: P4.17 U1.138 | length 979.6
  Top Layer w8: P4.17 2173.62,3551.38 U1.138
P92: P4.18 U1.139 | length 1021.6
  Top Layer w8: P4.18 1914.88,3725 1930.14,3709.74 1930.26,3709.74 2153.94,3486.06 U1.139
P93: P4.19 U1.141 | length 1052.6
  Top Layer w8: P4.19 1810.26,3714.74 1835.26,3714.74 2114.57,3435.43 U1.141
P94: P4.20 U1.142 | length 1088.8
  Top Layer w8: P4.20 1707.76,3717.24 1737.76,3717.24 2094.88,3360.12 U1.142
P95: P4.21 U1.143 | length 1122.1
  Top Layer w8: P4.21 1607.76,3717.24 1637.76,3717.24 2075.2,3279.8 U1.143
P96: P4.22 U1.144 | length 1161.9
  Top Layer w8: P4.22 1507.76,3717.24 1550.48,3717.24 1551.96,3716.62 cw(c1548.88,3709.24) 1556.51,3711.63 ccw(c1600,3725) 1567.83,3692.83 2051.51,3209.15 2051.51,2821.32 U1.144
pads on no net: U1.15 U1.16 U1.17 U1.18 U1.40 U1.53 U1.54 U1.55 U1.65 U1.77 U1.82 U1.83 U1.84 U1.85 U1.109 U1.110 U1.124 U1.125 U1.126 U1.127 U1.130 U1.131 U2.5 U2.8

## Polygon pours and split planes (outlines as drawn)
GND on Bottom Layer "GND_L02_P000" (solid, remove dead copper, pour order 0): 1000,3800 3800,3800 3800,1000 1000,1000
GND on Top Layer "GND_L01_P001" (solid, pour order 1): 1000,3800 3800,3800 3800,1000 1000,1000

## Silkscreen, mask and mechanical layers (free items; w line width, h text height)
Top Overlay:
  lines w10: 1195,3435 1195,1195 ; 1322.5,1322.5 1195,1195 ; 1780,3610 3610,3610 ; 3025,1195 1195,1195 ; 3482.5,3482.5 3610,3610 ; 3610,1370 3610,3610 ; 1150,3470 1450,3470 1450,3775 1150,3775 1150,3470 ; 3050,1025 3545,1025 3545,1330 3050,1330 3050,1025
  text "GND" at 1165,3665 h50 r270
  text "5V" at 1375,3660 h50 r270
  text "3V3" at 1270,3655 h50 r270
  text "IO [74..96]" at 3360,3595 h60 r180
  text "IO [48..73]" at 3590,2835 h60 r90
  text "DP [1..12]" at 1215,1970 h60 r270
  text "IO [25..43]" at 1445,1210 h60
  text "CLK" at 3425,1145 h50 r90
  text "SS" at 3520,1145 h50 r90
  text "RST" at 3130,1140 h50 r90
  text "MOSI" at 3225,1140 h50 r90
  text "MISO" at 3320,1140 h50 r90
Mechanical 13:
  the board outline again, w10

## Text inside footprints (layer, text, board x,y; h text height)
P1: Top Overlay "18" at 1131,1919 h40 r270; Top Overlay "6" at 1131,3119 h40 r270; Top Overlay "12" at 1131,2519 h40 r270; Top Overlay "24" at 1133.95,1319 h40 r270
P2: Top Overlay "18" at 2881,1131 h40; Top Overlay "6" at 1681,1131 h40; Top Overlay "1" at 1181,1131 h40; Top Overlay "12" at 2281,1131 h40
P3: Top Overlay "18" at 3669,2881 h40 r90; Top Overlay "6" at 3669,1681 h40 r90; Top Overlay "1" at 3669,1181 h40 r90; Top Overlay "12" at 3669,2281 h40 r90; Top Overlay "24" at 3666.05,3481 h40 r90
P4: Top Overlay "18" at 1919,3669 h40 r180; Top Overlay "6" at 3119,3669 h40 r180; Top Overlay "1" at 3619,3669 h40 r180; Top Overlay "12" at 2519,3669 h40 r180